# Altium PCB hau1906.PcbDoc
Units mil, origin at the board's own origin, x right, y up, seen from the top; angles counter-clockwise.
Board outline 3450 x 2325 mil, 2 copper layers (Top Layer, Bottom Layer); 31 components, 31 nets, 144 pads, 22 vias.
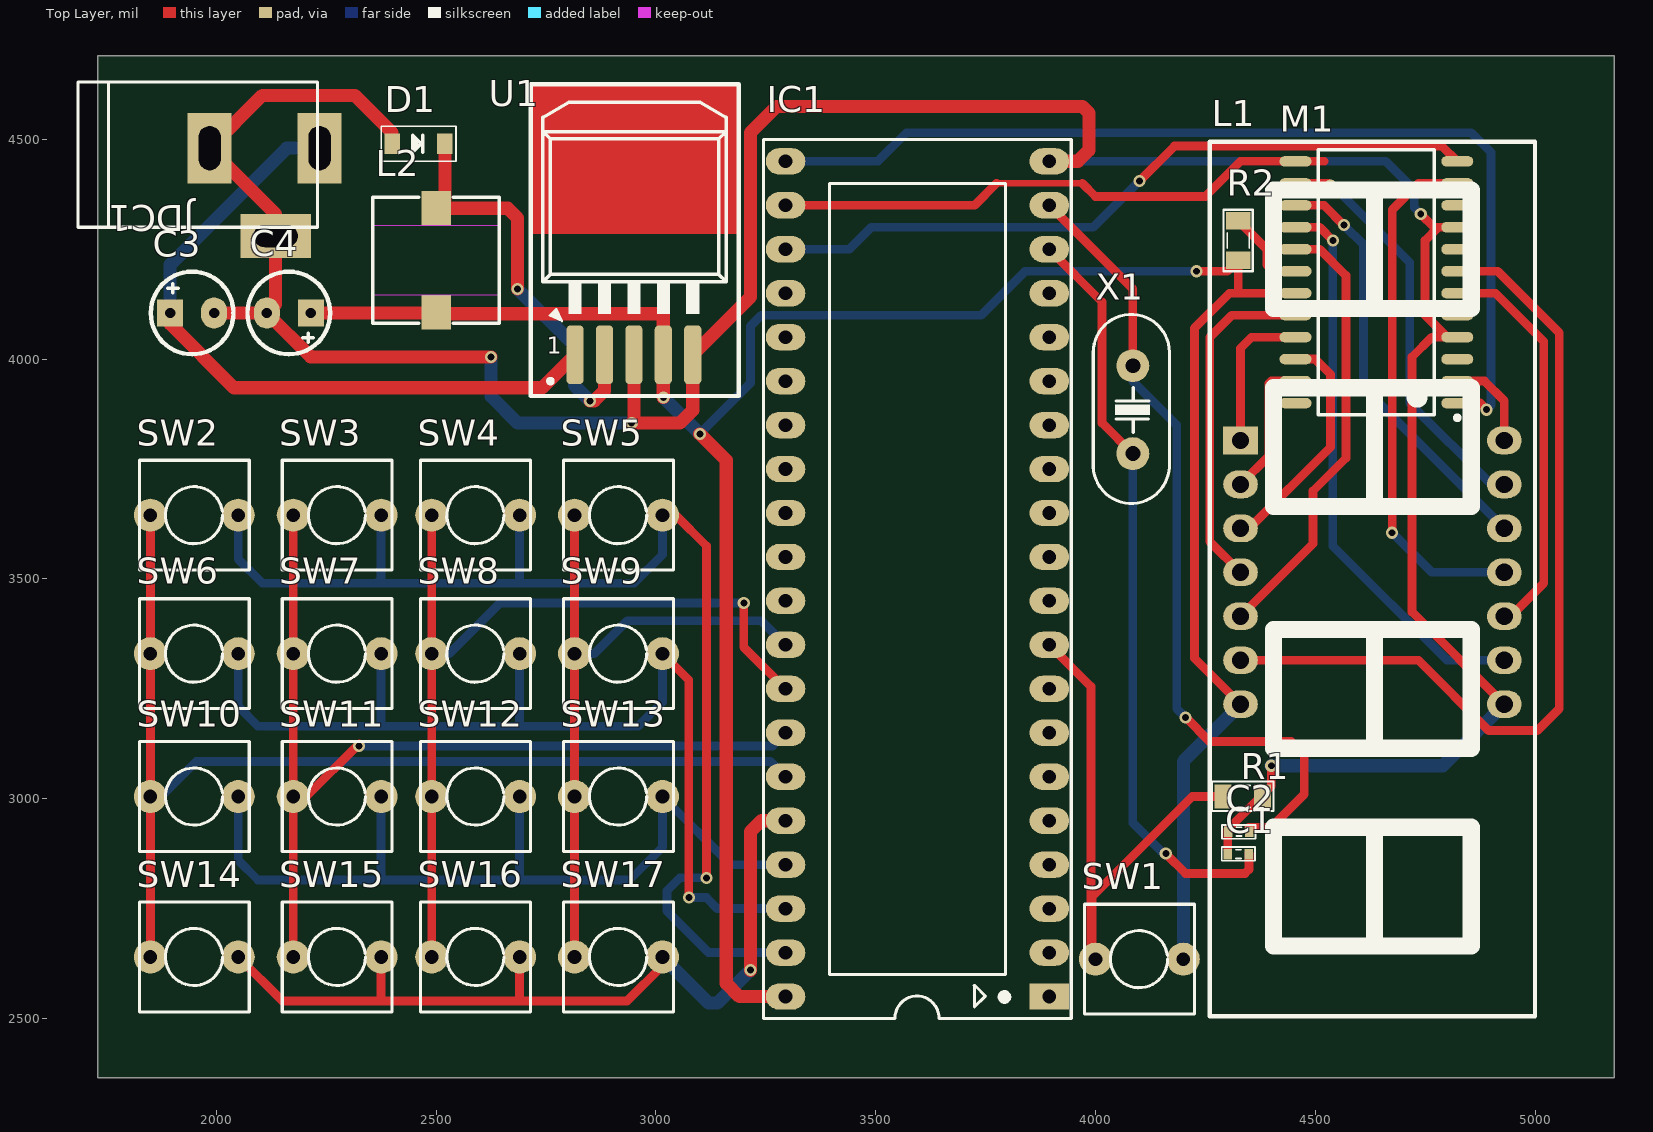
[diagram p0: Top Layer view]
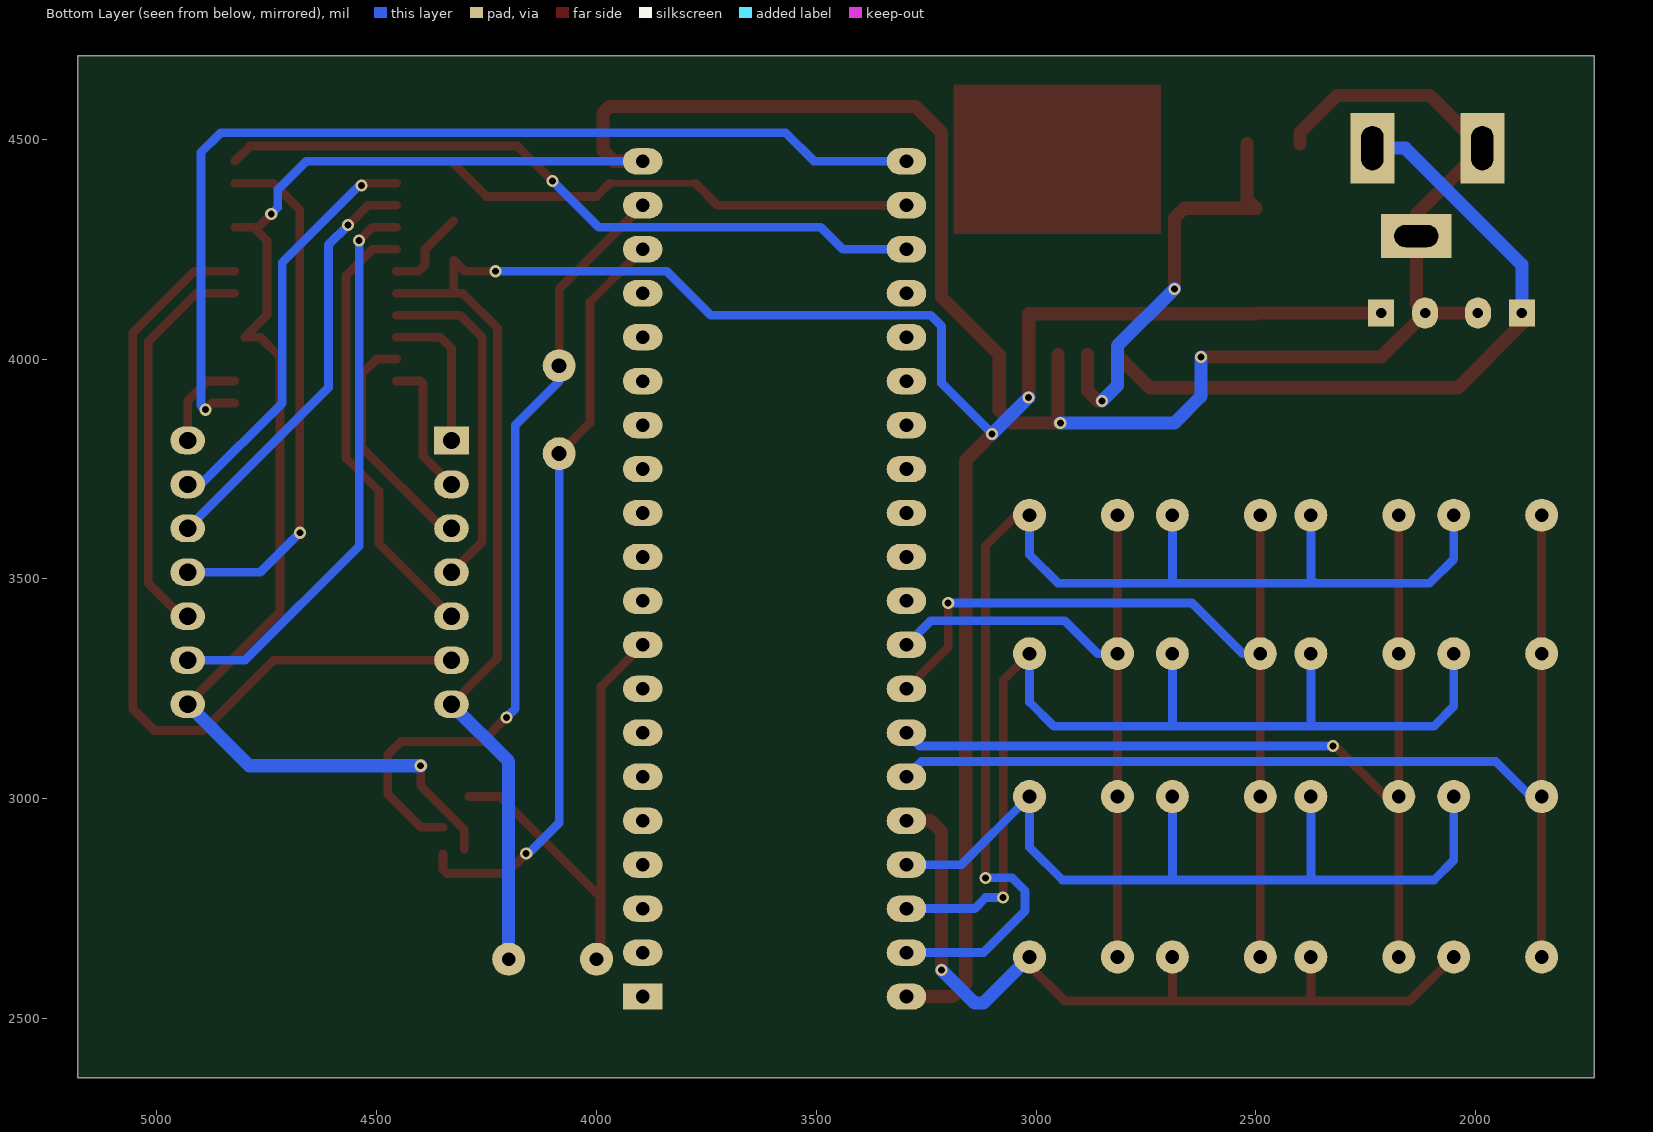
[diagram p1: Bottom Layer view, seen from below]

## Layer stack, top to bottom
Top Solder: solder mask 0.4, Solder Resist, Dk 3.5
Top Layer: signal copper 1.4
Dielectric 1: dielectric 12.6, FR-4, Dk 4.8
Bottom Layer: signal copper 1.4
Bottom Solder: solder mask 0.4, Solder Resist, Dk 3.5

## Board outline
1730,2365 1730,4690 5180,4690 5180,2365

## Design rules (kind name [scope] priority, off if disabled: settings)
Clearance [All] p1: gap=10 ignorepadtopadclearanceinfootprint=FALSE except(0: Arc-Text Arc-Hole Track-Text Track-Hole SMDPad-Text SMDPad-Hole THPad-Text THPad-Hole Via-Text Via-Hole Fill-Text Fill-Hole Poly-Text Poly-Hole Region-Text Region-Hole Text-Text Text-Hole)
PolygonConnect [All] p1: connectstyle=Relief reliefconductorwidth=10 reliefentries=4 polygonreliefangle="90 Angle" airgapwidth=10
RoutingVias [All] p1: holewidth=15.75 width=27.56 viastyle="Through Hole" minholewidth=15.75 minwidth=23.62 maxholewidth=19.68 maxwidth=27.56
SolderMaskExpansion [All] p1: expansion=4
Width [All] p1: maxlimit=30 minlimit=5 preferedwidth=20
30 further rules are at their usual default settings.

## Classes and differential pairs
component class 05: C3 C4 D1 JDC1 L2 U1
component class 04: SW2 SW3 SW4 SW5 SW6 SW7 SW8 SW9 SW10 SW11 SW12 SW13 SW14 SW15 SW16 SW17
component class 03: M1 R2
component class 02: C1 C2 IC1 R1 SW1 X1

## Components (designator, comment, footprint, x,y, rotation, side; value= is the part's Value field where it differs from the comment)
C1 "22 pF" CAP_0402 4325,2874 r0 top value=33p
C2 "22 pF" CAP_0402 4326,2925 r180 top value=33p
C3 "Cap Pol" C3MM 1945,4105 r0 top
C4 "Cap Pol" C3MM 2165,4105 r180 top
D1 "1N5822" DIO-SMD-123 2460,4490 r180 top value="Diode c?m 1N5408"
IC1 "AT89C52" DIP40/W0.6 3895,2550 r90 top
JDC1 "Jac DC" DC-IN 2110,4380 r0 top
L1 "Led 7 Seg 4 digit - Anode" LED7SEG-4-0.56-RG 4625,3495 r270 top
L2 "1.0 μH" L-SMD-M-7.3x4.5 2500,4225 r0 top
M1 "MAX7219ENG" SO24 4639.06,4175 r180 top
R1 "100k" RES-SMD-0805 4335,3005 r180 top
R2 "10k" RES-SMD-0805 4325,4270 r270 top
SW1 "SW" SW2 4000,2635 r0 top value="SW chip 2 pin"
SW2 "SW" SW2 1850,3645 r0 top value="SW chip 2 pin"
SW3 "SW" SW2 2175,3645 r0 top value="SW chip 2 pin"
SW4 "SW" SW2 2490,3645 r0 top value="SW chip 2 pin"
SW5 "SW" SW2 2815,3645 r0 top value="SW chip 2 pin"
SW6 "SW" SW2 1850,3330 r0 top value="SW chip 2 pin"
SW7 "SW" SW2 2175,3330 r0 top value="SW chip 2 pin"
SW8 "SW" SW2 2490,3330 r0 top value="SW chip 2 pin"
SW9 "SW" SW2 2815,3330 r0 top value="SW chip 2 pin"
SW10 "SW" SW2 1850,3005 r0 top value="SW chip 2 pin"
SW11 "SW" SW2 2175,3005 r0 top value="SW chip 2 pin"
SW12 "SW" SW2 2490,3005 r0 top value="SW chip 2 pin"
SW13 "SW" SW2 2815,3005 r0 top value="SW chip 2 pin"
SW14 "SW" SW2 1850,2640 r0 top value="SW chip 2 pin"
SW15 "SW" SW2 2175,2640 r0 top value="SW chip 2 pin"
SW16 "SW" SW2 2490,2640 r0 top value="SW chip 2 pin"
SW17 "SW" SW2 2815,2640 r0 top value="SW chip 2 pin"
U1 "LM2976" TO263 2935,4245 r0 top
X1 "4Mhz" XT2 4085,3885 r90 top

## Footprints (in the part's own frame and the unit in brackets; to place one, negate y for a bottom-side part, rotate by r counter-clockwise, add the part's x,y. Pads: shape width x height; smd on the part's side, far side on the other; paste and mask are expansions set on the pad)
C3MM [mm]
  rect 1.5x1.58 hole 0.6: 1(-1.27,0)
  oval 1.5x1.8 hole 0.6: 2(1.27,0)
  silkscreen extent -2.39,-2.39 2.39,2.39, body extent -2,-2.03 1.99,1.97, height 7.01
CAP_0402 [mm]
  rect 0.5x0.6 smd: 1(-0.61,0) 2(0.61,0)
  silkscreen extent -0.97,-0.38 0.97,0.41, body extent -0.5,-0.27 0.5,0.26, height 0.35
DC-IN [mil] "Jac DC input"
  rect 100x160 hole 50 slot 100 at 90 deg: 1(125,100) 2(-125,100)
  rect 160x100 hole 50 slot 100 at 0 deg: 3(25,-100)
  silkscreen extent -425,-80 120,250, body extent -410,-105 134,269, height 434
DIO-SMD-123 [mm]
  rect 0.9x1.2 smd: 1(1.524,0) 2(-1.524,0)
  silkscreen extent -2.16,-1.02 2.16,1.02, body extent -1.76,-0.8 1.94,0.8, height 1.25
DIP40/W0.6 [mil] "40 PIN, W 600mil, Pin to pin 100mil"
  rect 60x90 hole 31: 1(0,0)
  oval 60x90 hole 31: 2(100,0) 3(200,0) 4(300,0) 5(400,0) 6(500,0) 7(600,0) 8(700,0) 9(800,0) 10(900,0) 11(1000,0) 12(1100,0) 13(1200,0) 14(1300,0) 15(1400,0) 16(1500,0) 17(1600,0) 18(1700,0) 19(1800,0) 20(1900,0) 21(1900,600) 22(1800,600) 23(1700,600) 24(1600,600) 25(1500,600) 26(1400,600) 27(1300,600) 28(1200,600) 29(1100,600) 30(1000,600) 31(900,600) 32(800,600) 33(700,600) 34(600,600) 35(500,600) 36(400,600) 37(300,600) 38(200,600) 39(100,600) 40(0,600)
  silkscreen extent -50,-50 1950,650, body extent -82,-10 1982,600, height 224
L-SMD-M-7.3x4.5 [mm] "WE-PDA SMD Shielded Power Inductor, 7345"
  rect 1.7x2 smd: 1(0,3) 2(0,-3)
  Top Layer keep-out region: -3.65,-2 3.65,-2 3.65,2 -3.65,2
  silkscreen extent -3.65,-3.65 3.65,3.65, body extent -3.65,-3.65 3.65,3.65, height 4.05
LED7SEG-4-0.56-RG [mil]
  round 60 on Top Overlay: 0(-535,-205) 0(-85,-205) 0(465,-205) 0(915,-205)
  round 118.11 on Top Overlay: 0(-20,155) 0(-20,-95)
  rect 62.99x78.74 hole 39.37: 1(-320,-295)
  oval 62.99x78.74 hole 39.37: 2(-220,-295) 3(-120,-295) 4(-20,-295) 5(80,-295) 6(180,-295) 7(280,-295) 8(280,305) 9(180,305) 10(80,305) 11(-20,305) 12(-120,305) 13(-220,305) 14(-320,305)
  silkscreen extent -1000,-365 990,375, body extent -995,-370 985,378, height 565
RES-SMD-0805 [mil]
  rect 39.37x55 smd: 1(-45,0) 2(45,0)
  silkscreen extent -70,-34 70,33, body extent -39,-25 39,25, height 31
SO24 [mm] "SOIC, 24-Leads, Body 15.30x7.50mm, Pitch 1.27mm, IPC Medium Density"
  oval 1.85x0.6 smd: 1(-4.675,6.985) 2(-4.675,5.715) 3(-4.675,4.445) 4(-4.675,3.175) 5(-4.675,1.905) 6(-4.675,0.635) 7(-4.675,-0.635) 8(-4.675,-1.905) 9(-4.675,-3.175) 10(-4.675,-4.445) 11(-4.675,-5.715) 12(-4.675,-6.985) 13(4.675,-6.985) 14(4.675,-5.715) 15(4.675,-4.445) 16(4.675,-3.175) 17(4.675,-1.905) 18(4.675,-0.635) 19(4.675,0.635) 20(4.675,1.905) 21(4.675,3.175) 22(4.675,4.445) 23(4.675,5.715) 24(4.675,6.985)
  silkscreen extent -4.8,-7.65 3.35,7.96, body extent -5.2,-7.83 5.2,7.57, height 2.6
SW2 [mil] "SW button 2pin, 250x 250 mil"
  round 75 hole 31: 1(0,0) 2(200,0)
  silkscreen extent -25,-125 225,125
TO263 [mm]
  rrect50% 1x3.4 smd: 1(-3.019,-5.969) 2(-1.319,-5.969) 4(2.081,-5.969) 5(3.781,-5.969)
  rrect50% 1x3.4 smd mask+0: 3(0.381,-5.969)
  Top Layer region: -5.568,1.016 6.432,1.016 6.432,9.65 -5.568,9.65
  silkscreen extent -5.57,-8.35 6.43,9.65, body extent -4.73,-6.84 5.43,7.8, height 4.57
XT2 [mil] "Footpin for Crystal 2 pin"
  round 75 hole 34: 1(-100,0) 2(100,0)
  silkscreen extent -213,-83 217,90, body extent -216,-87 216,90, height 144

## Part data
C1 C2: library part CapSMD, "Capacitor", LatestRevisionDate=17-Jul-2002, LatestRevisionNote="Re-released for DXP Platform.", PackageReference=RAD-0.3, Published=8-Jun-2000, Publisher="Altium Limited"
C3 C4: "Polarized Capacitor (Axial)", LatestRevisionDate=17-Jul-2002, LatestRevisionNote="Re-released for DXP Platform.", PackageReference=POLAR0.8, Published=8-Jun-2000, Publisher="Altium Limited"
D1: "Schottky Rectifiers"
IC1: "Atmel AT89C52, 8k Byte Flash Memory , 40 Pin"
JDC1: library part DCIN, "Jac DC input"
L1: library part LED7SEG-4-RG
L2: library part L-SMD-1, Inductance="1.0 µH", Manufacturer="Wurth Elektronik", partNo=78477010, ComponentLink1Description=Manufacturer, ComponentLink1URL=http://www.we-online.de, ComponentLink2Description=Datasheet, ComponentLink2URL=http://katalog.we-online.de/pbs/datasheet/78477010.pdf, Created by="Baojun Chen", Created Date=Nov.2015
M1: "Serially Interfaced, 8-Digit LED Display Driver", Code_JEDEC=MS-001-AF, ComponentLink1Description="Manufacturer Link", ComponentLink1URL=http://www.maxim-ic.com/, ComponentLink2Description=Datasheet, ComponentLink2URL=http://pdfserv.maxim-ic.com/en/ds/MAX7219-MAX7221.pdf, DatasheetVersion=Jul-1997, LatestRevisionDate=29-May-2009, LatestRevisionNote="Component Body Added.", PackageDescription="DIP, 24-Pin, Row Spacing 7.62 mm, Pitch 2.54 mm", PackageReference=NG24A, PackageVersion=1997, Published=16-Jan-2001, Publisher="Altium Limited"
R1 R2: library part "Resistor - SMD", "Resistor", Manufacturer="Generic Components", Class=Passive, Published=08/06/2000, Publisher="Altium Hobart Technology Centre"
SW1 SW2 SW3 SW4 SW5 SW6 SW7 SW8 SW9 SW10 SW11 SW12 SW13 SW14 SW15 SW16 SW17: library part SW2, "Switch button 2 pin"
U1: library part LM2596, Max Input Voltage="12 V", Max Output Current="3 (6.0 peak) A", Max Output Voltage=mV, Temperature Range="-40 to +125 degC", Category=IC-Power, Min Input Voltage=mV, Min Output Voltage=mV, Mounting Technology="Surface Mount", Status=Unreleased, Supply Voltage=mV
X1: library part XT2, "Crystal For all Crystal 2pin."

## Via types
v1: diameter 27.56, hole 15.75, Top Layer to Bottom Layer, 22 vias

## Nets (pads, with @x,y where several pads share a name; then routed paths per layer and width w, separated by ;. In a path a pad name is that pad's centre, name@x,y a point inside that pad or via, vN(x,y) a via of type N, cw(c..) or ccw(c..) an arc to the next point about the centre after c; other vN are vias at no path point)
5V: C4.1 IC1.40 L1.7 L2.2 M1.19 R2.2 SW1.2 U1.4 | length 5869.8
  Top Layer w20: v1(4230,4200) 4300,4200 R2.2 4325,4155 4330,4150 ; L1.7 4225,3320 4225,4070 4305,4150 4330,4150 ; M1.19 4330,4150
  Top Layer w30: C4.1 2498.11,4105 2500.04,4103.07 3016.93,4103.07 U1.4 v1(3016.93,3913.07) ; v1(3100,3830) 3160,3770 3160,2580 3190,2550 IC1.40
  Bottom Layer w20: v1(3100,3830) 3215,3945 3215,4075 3240,4100 3740,4100 3840,4200 v1(4230,4200)
  Bottom Layer w30: v1(3016.93,3913.07) v1(3100,3830) ; SW1.2 4200,3085 L1.7
COL_0: IC1.35 SW2.1 SW6.1 SW10.1 SW14.1 | length 2497.6
  Top Layer w20: SW14.1 SW10.1 SW6.1 SW2.1
  Bottom Layer w20: SW10.1 1875,3005 1955,3085 3260,3085 IC1.35
COL_1: IC1.34 SW3.1 SW7.1 SW11.1 SW15.1 | length 2192.1
  Top Layer w20: SW15.1 SW11.1 ; SW3.1 SW7.1 SW11.1 ; v1(2325,3120) 2325,3125 2205,3005 SW11.1
  Bottom Layer w20: v1(2325,3120) 3265,3120 IC1.34
COL_2: IC1.33 SW4.1 SW8.1 SW12.1 SW16.1 | length 2011.1
  Top Layer w20: SW16.1 SW12.1 SW8.1 SW4.1 ; v1(3200,3445) 3200,3345 IC1.33
  Bottom Layer w20: SW8.1 2530,3330 2645,3445 v1(3200,3445) ; IC1.33@3285,3240 IC1.33
COL_3: IC1.32 SW5.1 SW9.1 SW13.1 SW17.1 | length 1538.8
  Top Layer w20: SW17.1 SW13.1 SW9.1 SW5.1
  Bottom Layer w20: SW9.1 2860,3330 2935,3405 3240,3405 IC1.32
D0: L1.14 M1.2 | length 215.5
  Top Layer w20: M1.2 4885,3950 4930,3905 L1.14
D1: L1.11 M1.11 | length 1205.2
  Top Layer w20: v1(4675,3605) 4675,4340 4735,4400 M1.11 ; L1.11 L1.11@4935,3515
  Bottom Layer w20: v1(4675,3605) 4765,3515 L1.11
D2: L1.10 M1.6 | length 913.5
  Top Layer w20: M1.6 4910,4150 5020,4040 5020,3490 4945,3415 L1.10
D3: L1.6 M1.7 | length 1956.9
  Top Layer w20: L1.6 4735,3315 4895,3155 5005,3155 5055,3205 5055,4060 4915,4200 M1.7
GND: C1.1 C2.2 C3.2 C4.2 D1.1 IC1.20 JDC1.2 JDC1.3 L1.8 M1.4 M1.9 R1.1 U1.3 U1.5 | length 7147.8
  Top Layer w20: C1.1@4301,2885 4301,2930 4400,3029 v1(4400,3075) ; v1(4740,4330) 4770,4300 4780,4300 ; M1.9 4780,4300 ; L1.8 4720,3425 4720,4005 4765,4050 4800,4050 4750,4100 4750,4270 4780,4300
  Top Layer w30: C3.2 C4.2 ; D1.1 2400,4515 2315,4600 2105,4600 JDC1.2 2135,4330 JDC1.3 2135,4125 C4.2 ; v1(2625,4005) 2215,4005 C4.2 ; U1.3 2950,3860 v1(2945,3855) 3055,3855 3083.86,3883.86 U1.5 3215,4141.14 3215,4515 3275,4575 3970,4575 3985,4560 3985,4475 3960,4450 IC1.20
  Bottom Layer w20: IC1.20 4660,4450 4725,4385 4725,4345 v1(4740,4330)
  Bottom Layer w30: v1(2625,4005) 2625,3915 2685,3855 v1(2945,3855) ; v1(4400,3075) 4790,3075 L1.8
NetC1_2: C1.2 IC1.18 X1.1 | length 1734.1
  Top Layer w20: IC1.18 4015,4130 4015,3855 X1.1 ; v1(4160,2875) 4205,2830 4340,2830 4349,2839 C1.2
  Bottom Layer w20: X1.1 4085,2945 4155,2875 v1(4160,2875)
NetC2_1: C2.1 IC1.19 X1.2 | length 1845.7
  Top Layer w20: IC1.19 4085,4160 X1.2 ; v1(4205,3185) 4260,3130 4445,3130 4475,3100 4475,3010 4400,2935 C2.1@4349,2935
  Bottom Layer w20: X1.2 4085,3950 4185,3850 4185,3205 v1(4205,3185)
NetC3_1: C3.1 JDC1.1 U1.1 | length 1597
  Top Layer w30: C3.1 1895,4080 2040,3935 2741.14,3935 U1.1
  Bottom Layer w30: C3.1 1895,4215 2160,4480 JDC1.1
NetD1_2: D1.2 L2.1 U1.2 | length 958.4
  Top Layer w30: D1.2 2520,4363.11 L2.1 2663.11,4343.11 2685,4321.22 v1(2685,4160) ; v1(2850,3905) 2860,3905 2883.07,3928.07 U1.2
  Bottom Layer w30: v1(2685,4160) 2815,4030 2815,3940 v1(2850,3905)
NetIC1_9: IC1.9 R1.2 SW1.1 | length 1293.8
  Top Layer w5: SW1.1 4000,2775
  Top Layer w20: IC1.9 3990,3255 3990,2775 ; SW1.1 3990,2645 3990,2775 ; R1.2 4220,3005 3990,2775
NetIC1_21: IC1.21 M1.1 | length 2312.8
  Top Layer w20: M1.1 4875,3900 v1(4890,3885)
  Bottom Layer w20: IC1.21 3505,4450 3570,4515 4855,4515 4900,4470 4900,3895 v1(4890,3885)
NetIC1_22: IC1.22 M1.13 | length 1291.3
  Top Layer w15: 3775,4400 3970,4400
  Top Layer w20: IC1.22 3725,4350 3775,4400 ; 3970,4400 4000,4370 4250,4370 4330,4450 M1.13 4520,4450
NetIC1_23: IC1.23 M1.12 | length 1639.9
  Top Layer w20: v1(4100,4405) 4180,4485 4788.11,4485 M1.12
  Bottom Layer w20: IC1.23 3440,4250 3490,4300 3995,4300 v1(4100,4405)
NetL1_1: L1.1 M1.21 | length 345.4
  Top Layer w20: L1.1 4330,4025 4355,4050 M1.21
NetL1_2: L1.2 M1.23 | length 319
  Top Layer w20: L1.2 4395,3780 4395,3945 4400,3950 M1.23
NetL1_3: L1.3 M1.22 | length 541.1
  Top Layer w20: L1.3 4350,3615 4535,3800 4535,3965 4500,4000 M1.22
NetL1_4: L1.4 M1.20 | length 779.7
  Top Layer w20: L1.4 4260,3585 4260,4050 4310,4100 M1.20
NetL1_5: L1.5 M1.17 | length 1014.3
  Top Layer w20: L1.5 4495,3580 4495,3700 4570,3775 4570,4190 4510,4250 M1.17
NetL1_9: L1.9 M1.16 | length 1290.1
  Top Layer w20: M1.16 4510,4300 v1(4540,4270)
  Bottom Layer w20: v1(4540,4270) 4540,3575 4800,3315 L1.9
NetL1_12: L1.12 M1.15 | length 969.8
  Top Layer w20: M1.15 4520,4350 v1(4565,4305)
  Bottom Layer w20: v1(4565,4305) 4610,4260 4610,3935 L1.12
NetL1_13: L1.13 M1.14 | length 946.2
  Top Layer w20: M1.14 4530,4400 v1(4535,4395)
  Bottom Layer w20: v1(4535,4395) 4540,4395 4715,4220 4715,3900 4900,3715 L1.13
NetM1_18: M1.18 R2.1 | length 205.2
  Top Layer w5: M1.18@4450.01,4204.99 M1.18
  Top Layer w20: R2.1 4390,4250 4390,4215 4405,4200 M1.18
ROW_0: IC1.39 SW2.2 SW3.2 SW4.2 SW5.2 | length 2875.8
  Top Layer w20: SW5.2 3045,3645 3115,3575 v1(3115,2820) ; IC1.39@3285,2640 IC1.39
  Bottom Layer w20: SW2.2 2050,3545 2105,3490 2365,3490 ; SW3.2 2375,3500 2365,3490 ; SW4.2 2690,3495 2695,3490 ; SW5.2 3015,3555 2950,3490 2695,3490 ; v1(3115,2820) 3055,2820 3025,2790 3025,2745 3120,2650 IC1.39 ; 2365,3490 2695,3490
ROW_1: IC1.38 SW6.2 SW7.2 SW8.2 SW9.2 | length 2380.8
  Top Layer w20: SW9.2 3075,3270 v1(3075,2775)
  Bottom Layer w20: SW6.2 2050,3210 2095,3165 2380,3165 ; SW7.2 2375,3170 2380,3165 ; SW8.2 2690,3170 2695,3165 ; SW9.2 3015,3220 2960,3165 2695,3165 ; v1(3075,2775) 3115,2775 3140,2750 IC1.38 ; 2380,3165 2695,3165
ROW_2: IC1.37 SW10.2 SW11.2 SW12.2 SW13.2 | length 1998.9
  Bottom Layer w20: SW10.2 2050,2860 2095,2815 2375,2815 ; SW11.2 2375,2815 ; SW12.2 2690,2815 ; IC1.37 3170,2850 SW13.2 3015,2890 2940,2815 2690,2815 ; 2375,2815 2690,2815
ROW_3: IC1.36 SW14.2 SW15.2 SW16.2 SW17.2 | length 1941.5
  Top Layer w20: SW14.2 2150,2540 2370,2540 ; SW15.2 2375,2545 2370,2540 ; SW16.2 2690,2540 ; SW17.2 3015,2620 2935,2540 2690,2540 ; 2370,2540 2690,2540
  Top Layer w30: v1(3215,2610) 3215,2925 3240,2950 IC1.36
  Bottom Layer w30: SW17.2 3120,2535 3140,2535 v1(3215,2610)
pads on no net: IC1.1 IC1.2 IC1.3 IC1.4 IC1.5 IC1.6 IC1.7 IC1.8 IC1.10 IC1.11 IC1.12 IC1.13 IC1.14 IC1.15 IC1.16 IC1.17 IC1.24 IC1.25 IC1.26 IC1.27 IC1.28 IC1.29 IC1.30 IC1.31 L1.0 M1.3 M1.5 M1.8 M1.10 M1.24

## Silkscreen, mask and mechanical layers (free items; w line width, h text height)
Bottom Solder:
  the board outline again, w10

## Text inside footprints (layer, text, board x,y; h text height)
U1: Top Overlay "1" at 2752.14,4012 h39.37